# EAGLE board sensor (EAGLE 6.3)
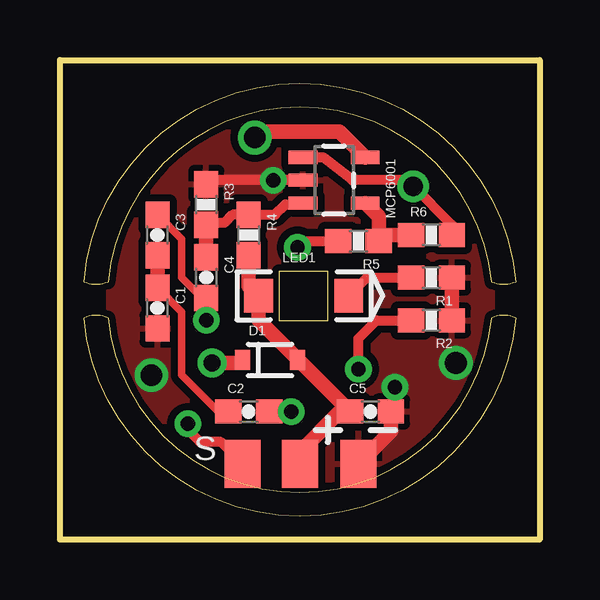
[diagram p0: board, top side]
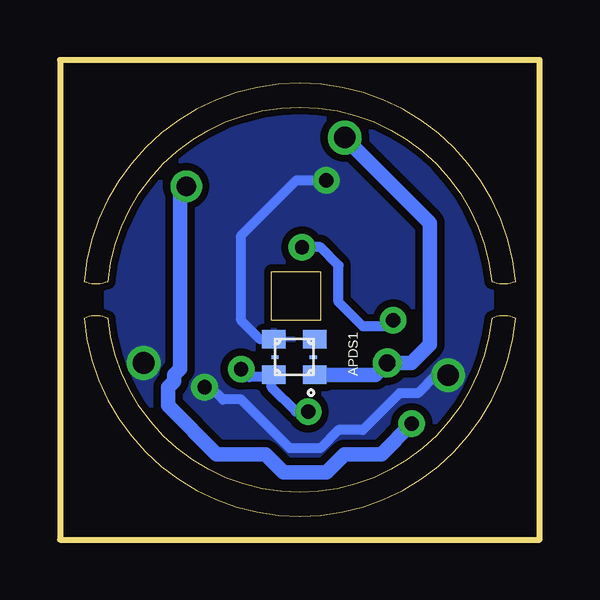
[diagram p1: board, bottom side, seen from below]

Size 20 x 20 mm. Coordinates in mm from the lower left corner, seen from the top.
Outline: 0,0 0,20 20,20 20,0 0,0
Outline: 2,9.25 arc169 18,9.25 arc-44 19,9.25 arc-170 1,9.25 arc-44 2,9.25
Outline: 18,10.75 arc169 2,10.75 arc-44 1,10.75 arc-170 19,10.75 arc-44 18,10.75
Outline: 9.14,11.18 9.14,9.14 11.18,9.14 11.18,11.18 9.14,11.18
Copper layers (1*16): Top 0.035mm / dielectric 1.5mm / Bottom 0.035mm
Design rules "SparkFun-2-layer": minimum track width 7mil, minimum drill 15mil, track to track 8mil, track to pad 8mil, pad to pad 8mil, via to via 8mil, smd to smd 8mil, copper to edge 8mil, drill to drill 8mil, minimum pad ring 12mil, minimum via ring 10mil, stop-mask expansion 4mil, vias tented up to drill 20mil, thermal gap 10mil

## Footprints (pad centres in the part's own frame; a part is rotated, then mirrored left to right if it is on the bottom)
MINIATURE-CHIPLED = smd 0.762 x 1.016: P$1 0.76,0.807; P$3 -0.721,0.807; P$4 -0.721,-0.893; P$6 0.76,-0.893 | smd 0.152 x 0.305: P$2 0.02,0.757; P$5 0.02,-0.843
0603-CAP = smd 1.1 x 1: 1 -0.85,0; 2 0.85,0
SOD-323 = smd 0.63 x 0.83: 1 -1.15,0; 2 1.15,0
PAD-1.5X4.5 = smd 1.5 x 2: P$1 0,0
LED-1206-REVERSE-MOUNT = smd 1.2 x 1.4: A -1.881,0; C 1.881,0
SOT23-5 = smd 0.55 x 1.2: 1 -0.95,-1.3; 2 0,-1.3; 3 0.95,-1.3; 4 0.95,1.3; 5 -0.95,1.3
0603-RES = smd 1.1 x 1: 1 -0.85,0; 2 0.85,0

## Placement (x,y rotation side)
APDS1  [MINIATURE-CHIPLED]  10.19,7.63 270 bottom
C1  4.7uF  [0603-CAP]  4.06,9.65 270 top
C2  4.7uF  [0603-CAP]  7.87,5.33 0 top
C3  4.7uF  [0603-CAP]  4.06,12.7 270 top
C4  2.2uF  [0603-CAP]  6.1,10.92 270 top
C5  2.2uF  [0603-CAP]  12.95,5.33 0 top
D1  BAT20JFILM  [SOD-323]  8.76,7.49 0 top
GND  M01SMD-4.5X1.5  [PAD-1.5X4.5]  12.45,3.16 0 top
LED1  [LED-1206-REVERSE-MOUNT]  10.16,10.16 0 top
MCP6001  OPA344  [SOT23-5]  11.43,14.99 270 top
OUT  M01SMD-4.5X1.5  [PAD-1.5X4.5]  7.62,3.16 0 top
R1  470  [0603-RES]  15.49,10.92 180 top
R2  12K  [0603-RES]  15.49,9.14 180 top
R3  100K  [0603-RES]  6.1,13.97 270 top
R4  100K  [0603-RES]  7.87,12.7 270 top
R5  10K  [0603-RES]  12.45,12.45 180 top
R6  3.3M  [0603-RES]  15.49,12.7 0 top
VCC  M01SMD-4.5X1.5  [PAD-1.5X4.5]  10,3.16 0 top

## Library data of the parts
APDS1 LED1 = librae
C1-C5 = SparkFun-Capacitors; PROD_ID: CAP-00868; VALUE: 1.0uF
D1 = SparkFun-DiscreteSemi; PROD_ID: DIO-11623
GND OUT VCC = SparkFun-Connectors
MCP6001 = SparkFun-AnalogIC
R1-R4 R6 = SparkFun-Resistors; PROD_ID: RES-00824; VALUE: 10K
R5 = SparkFun-Resistors; PROD_ID: RES-00824

## Nets
GND: APDS1.P$4 C1.2 C5.2 GND.P$1 MCP6001.2 R1.1 R2.1 R3.1
N$3: LED1.C R1.2
N$6: MCP6001.4 R5.1 R6.1
N$7: APDS1.P$6 C2.2 R2.2
N$8: C1.1 C2.1 C3.2
N$9: C3.1 C4.2 R5.2
N$10: C4.1 MCP6001.3 R3.2 R4.1
OUT: MCP6001.1 OUT.P$1 R6.2
VCC: C5.1 D1.2 LED1.A R4.2 VCC.P$1
VDD: APDS1.P$1 D1.1 MCP6001.5

## Tracks (layer width: path | path; a pad name or v marks a point on that pad's centre or on a via)
GND  (via drill 0.6, 0.9)
  Top 0.406: 6.18,14.73 R3.1 6.1,14.99 v8.89,14.99 MCP6001.2 | v13.97,6.35 13.97,5.59 13.72,5.33
  Top 0.61: GND.P$1 13.8,4.51 C5.2 | R1.1 R2.1
  Bottom 0.406: v8.89,14.99 MCP6001.2 12.45,12.67 12.45,9.14 11.65,8.35 APDS1.P$4 | v3.81,6.86 4.32,6.86 5.08,6.1 5.84,6.1 7.37,4.57 8.38,4.57 9.14,3.81 10.41,3.81 12.45,5.84 13.21,5.84 13.72,6.35 v13.97,6.35
  other vias: 16.51,7.37
  pour Top (isolate 0.305): 2.03,18.03 2.03,2.03 18.03,2.03 18.03,18.03
  pour Bottom (isolate 0.305): 2.03,18.03 2.03,2.03 18.03,2.03 18.03,18.03 2.29,18.03
N$3
  Top 0.406: LED1.C 12.8,10.92 R1.2
N$6
  Top 0.61: R6.1 13.55,12.7 R5.1 13.3,13.47 MCP6001.4
N$7  (via drill 0.6)
  Top 0.406: v9.65,5.33 C2.2 | v12.45,7.11 12.45,8.38 13.21,9.14 R2.2
  Bottom 0.406: v9.65,5.33 10.16,5.33 11.18,6.35 11.18,6.78 | 11.18,6.78 APDS1.P$6 | 11.18,6.78 12.11,6.78 v12.45,7.11
N$8
  Top 0.305: C1.1 5.08,9.49 5.08,6.86 6.6,5.33 C2.1
  Top 0.61: C1.1 C3.2
N$9  (via drill 0.6)
  Top 0.305: C3.1 5.08,12.53 5.08,10.92 5.93,10.07 C4.2
  Top 0.406: C4.2 v6.1,9.14 | v9.91,12.19 10.16,12.45 R5.2
  Bottom 0.406: v6.1,9.14 6.35,8.89 7.37,8.89 8.38,9.91 8.38,11.43 9.14,12.19 v9.91,12.19
N$10
  Top 0.406: R3.2 6.18,13.21 6.86,13.21 7.2,13.55 R4.1 8.98,13.55 9.4,13.97 10.06,13.97 MCP6001.3
  Top 0.61: R3.2 C4.1
OUT  (via drill 0.6, 0.8)
  Top 0.406: OUT.P$1 6.71,4.06 5.84,4.06 5.33,4.57 v5.33,4.83 | MCP6001.1 10.99,15.94 12.19,14.99 14.48,14.99 v14.73,14.73 16.34,13.12 R6.2
  Bottom 0.61: v5.33,4.83 6.6,3.56 8.13,3.56 8.89,2.79 10.67,2.79 11.43,3.56 13.46,3.56 15.49,5.59 15.49,6.35 15.24,6.6 15.24,6.86 14.99,7.11 14.99,14.48 v14.73,14.73
VCC
  Top 0.61: VCC.P$1 10,3.65 11.68,5.33 C5.1 9.91,7.53 | 9.91,7.53 8.28,9.16 LED1.A 7.87,10.56 R4.2 | D1.2 9.91,7.53
VDD  (via drill 0.7, 0.9)
  Top 0.61: v6.35,7.37 7.49,7.37 D1.1 | MCP6001.5 11.65,17.02 8.38,17.02 v8.13,16.76
  Bottom 0.61: APDS1.P$1 6.85,6.87 v6.35,7.37 5.33,7.37 4.57,8.13 4.57,13.21 v8.13,16.76

## Text on the board
tPlace: S
_tNames: R1 | R1 | C3 | C3 | C1 | C1 | LED1 | LED1 | R6 | R6 | C4 | C4 | R5 | R5 | R4 | R4 | MCP6001 | MCP6001 | SCHOTTKEY | SCHOTTKEY | R3 | R3 | JP1 | JP1
_bNames: C2 | C2 | R2 | R2 | APDS1 | APDS1 | C5 | C5